# Altium PCB XM125.PcbDoc
Units mm, origin at the board's own origin, x right, y up, seen from the top; angles counter-clockwise.
Board outline 18.6 x 15 mm, 4 copper layers (Layer 1, Layer 2, Layer 3, Layer 4), stack 1 mm thick; 24 components, 28 nets, 164 pads, 93 vias.
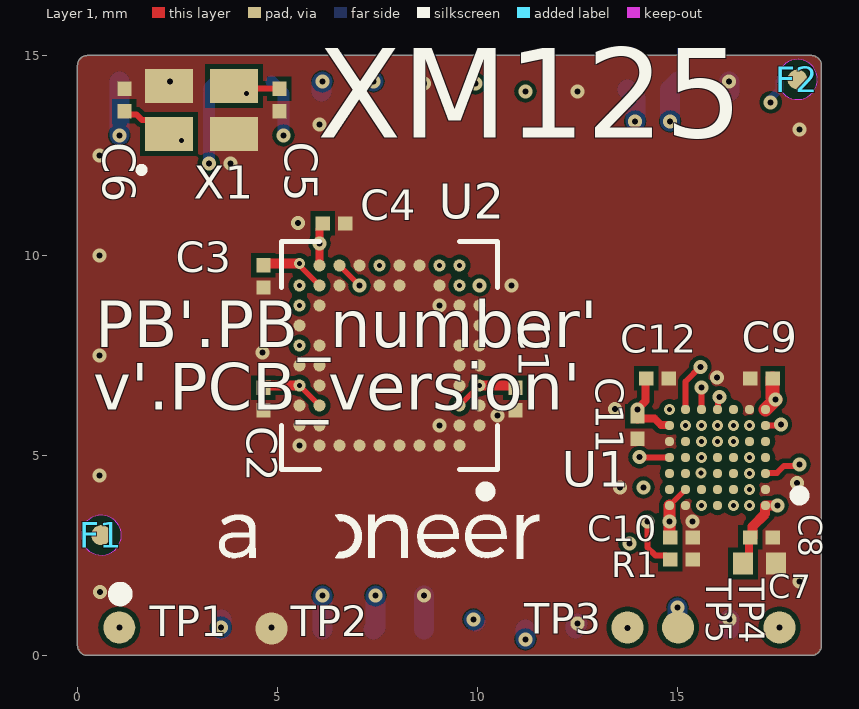
[diagram p0: Layer 1 view]
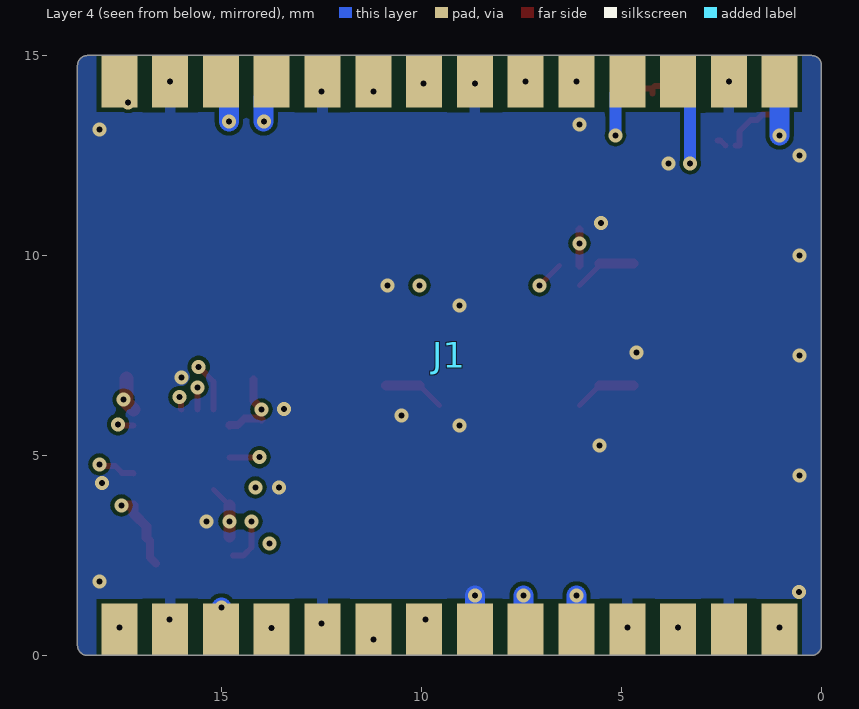
[diagram p1: Layer 4 view, seen from below]
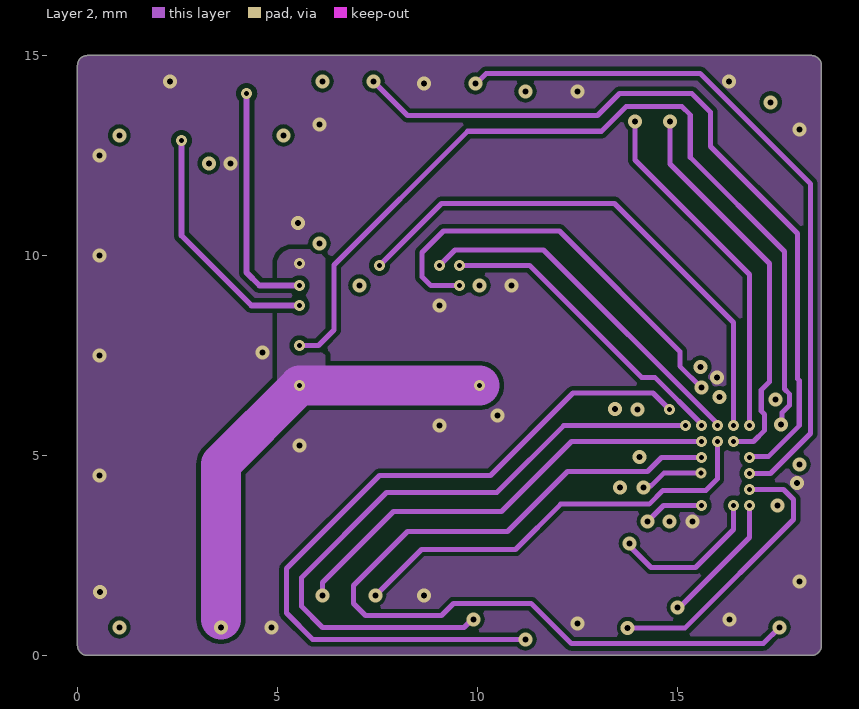
[diagram p2: Layer 2]
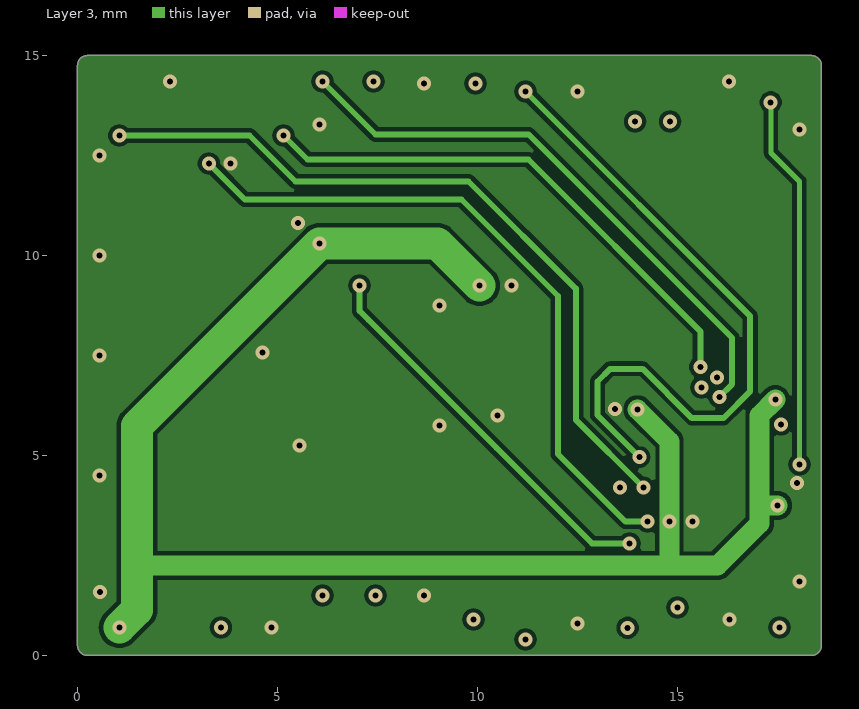
[diagram p3: Layer 3]
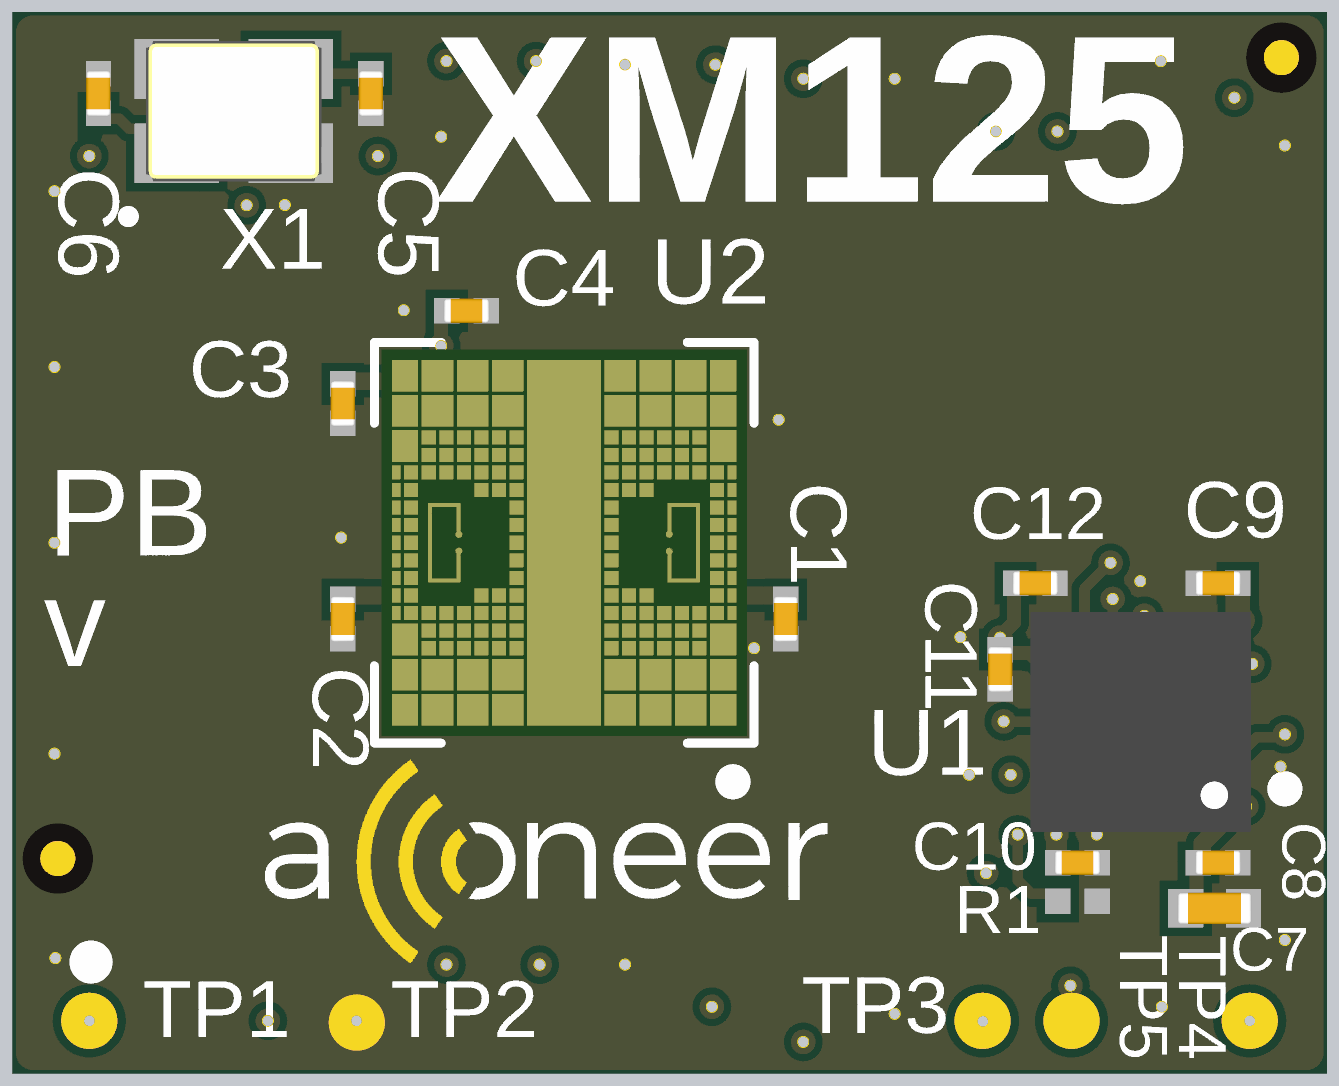
[diagram p4: 3D render of the assembled board from above, using the file's embedded part models]

## Layer stack, top to bottom
Top Solder: solder mask 0.0127, Solder Resist, Dk 3.3
Layer 1: signal copper 0.035
Dielectric 1: prepreg 0.075, FR-4, Dk 4.3
Layer 2: signal copper 0.035
Dielectric2: core 0.71, FR-4, Dk 4.3
Layer 3: signal copper 0.035
Dielectric3: prepreg 0.075, FR-4, Dk 4.3
Layer 4: signal copper 0.035
Bottom Solder: solder mask 0.0127, Solder Resist, Dk 3.3

## Board outline
0,0.25 0,14.75 cw(c0.25,14.75) 0.25,15 18.35,15 cw(c18.35,14.75) 18.6,14.75 18.6,0.25 cw(c18.35,0.25) 18.35,0 0.25,0 cw(c0.25,0.25)

## Design rules (kind name [scope] priority, off if disabled: settings)
Clearance Fiducial_keepout [IsKeepOut] p1: gap=0 ignorepadtopadclearanceinfootprint=TRUE
Clearance [All] p2: gap=0.1 ignorepadtopadclearanceinfootprint=TRUE except(0: Fill-Text Poly-Text Region-Text; 0.11: Arc-Via Arc-Fill Arc-Poly Arc-Region Track-Via Track-Fill Track-Poly Track-Region; 0.12: Arc-Hole Track-Hole SMDPad-SMDPad SMDPad-Fill SMDPad-Poly SMDPad-Region Fill-Fill Fill-Poly Fill-Region Poly-Poly Poly-Region Region-Region; 0.127: Text-Hole; 0.15: SMDPad-Hole THPad-Via; 0.2: Fill-Hole Poly-Hole Region-Hole; 0.25: Arc-THPad Track-THPad SMDPad-THPad THPad-Fill THPad-Poly THPad-Region; 0.254: THPad-Hole; 0.5: THPad-THPad)
ComponentClearance ComponentClearance_SB1 [InComponent('SB1')] p1: gap=0.08 collisioncheckmode=3 verticalgap=0.08 showdistances=FALSE
ComponentClearance [All] p2: gap=0.2 collisioncheckmode=3 verticalgap=0.2 showdistances=FALSE
HoleSize [All] p1: absolutevalues=TRUE maxlimit=2.54 minlimit=0.12 maxpercent=80.000 minpercent=20.000
HoleToHoleClearance [All] p1: gap=0.1 allowstackedmicrovias=FALSE
MinimumSolderMaskSliver [All] p1: minsoldermaskwidth=0.1
NetAntennae [All] p1 off: netantennaetolerance=0
PolygonConnect PolygonConnect_L1 [OnLayer('Layer 1')] p1: connectstyle=Direct reliefconductorwidth=0.2 reliefentries=4 polygonreliefangle="90 Angle" airgapwidth=0.127
PolygonConnect [All] p2: thpad.connectstyle=Relief thpad.reliefconductorwidth=0.254 thpad.reliefentries=4 thpad.polygonreliefangle="90 Angle" thpad.airgapwidth=0.127 smdpad.connectstyle=Relief smdpad.reliefconductorwidth=0.254 smdpad.reliefentries=4 smdpad.polygonreliefangle="90 Angle" smdpad.airgapwidth=0.127 via.connectstyle=Direct via.reliefconductorwidth=0.254 via.reliefentries=4 via.polygonreliefangle="90 Angle" via.airgapwidth=0.254
PolygonConnect PolygonConnect_A111_decoupling [HasFootprint('CAPC0603X04N_no_silkscreen') And OnLayer('Layer 1')] p3 off: thpad.connectstyle=Relief thpad.reliefconductorwidth=0.254 thpad.reliefentries=4 thpad.polygonreliefangle="90 Angle" thpad.airgapwidth=0.254 smdpad.connectstyle=Direct smdpad.reliefconductorwidth=0.254 smdpad.reliefentries=4 smdpad.polygonreliefangle="90 Angle" smdpad.airgapwidth=0.254 via.connectstyle=Relief via.reliefconductorwidth=0.254 via.reliefentries=4 via.polygonreliefangle="90 Angle" via.airgapwidth=0.254
PolygonConnect PolygonConnect_XTAL [HasFootprint('XTAL_320X260_no_silkscreen') And OnLayer('Layer 1')] p4 off: thpad.connectstyle=Relief thpad.reliefconductorwidth=0.254 thpad.reliefentries=4 thpad.polygonreliefangle="90 Angle" thpad.airgapwidth=0.254 smdpad.connectstyle=Direct smdpad.reliefconductorwidth=0.254 smdpad.reliefentries=4 smdpad.polygonreliefangle="90 Angle" smdpad.airgapwidth=0.254 via.connectstyle=Relief via.reliefconductorwidth=0.254 via.reliefentries=4 via.polygonreliefangle="90 Angle" via.airgapwidth=0.254
PolygonConnect PolygonConnect_A111 [HasFootprint('BGA50C50P10X10_520X550X90') And OnLayer('Layer 1')] p5 off: thpad.connectstyle=Relief thpad.reliefconductorwidth=0.254 thpad.reliefentries=4 thpad.polygonreliefangle="90 Angle" thpad.airgapwidth=0.254 smdpad.connectstyle=Direct smdpad.reliefconductorwidth=0.254 smdpad.reliefentries=4 smdpad.polygonreliefangle="90 Angle" smdpad.airgapwidth=0.254 via.connectstyle=Relief via.reliefconductorwidth=0.254 via.reliefentries=4 via.polygonreliefangle="90 Angle" via.airgapwidth=0.254
RoutingCorners [All] p1: cornerstyle=45-Degree minsetback=2 maxsetback=2
RoutingVias microvia [IsMicroVia] p1: holewidth=0.12 width=0.27 viastyle="Through Hole" minholewidth=0.12 minwidth=0.27 maxholewidth=0.12 maxwidth=0.27
RoutingVias [All] p2: holewidth=0.15 width=0.4 viastyle="Through Hole" minholewidth=0.12 minwidth=0.27 maxholewidth=0.15 maxwidth=0.4
SilkToSilkClearance [All] p1: silktosilkclearance=0.1
SilkToSolderMaskClearance [IsPad] p1: minsilkscreentomaskgap=0.05 clearancetoexposedcopper=TRUE
SolderMaskExpansion [All] p1: expansion=0 istentingtop=FALSE useseparateexpansions=TRUE expansionbottom=0 istentingbottom=FALSE
Width Width_power [InNetClass('Power')] p1: maxlimit=2 minlimit=0.127 preferedwidth=0.5 midlayer1_minwidth=0.3 midlayer2_minwidth=0.3 bottomlayer_minwidth=0.3 minimp=50.000000 maximp=50.000000 favimp=50.000000
Width [All] p2: maxlimit=2 minlimit=0.1 preferedwidth=0.15 toplayer_minwidth=0.12 midlayer2_minwidth=0.12 bottomlayer_minwidth=0.12 minimp=50.000000 maximp=50.000000 favimp=50.000000
22 further rules are at their usual default settings.

## Components (designator, comment, footprint, x,y, rotation, side; value= is the part's Value field where it differs from the comment)
C1 "Capacitor 1uF, metric 0603" CAPC0603X04L_no_silkscreen 10.95,6.415 r270 top value=1µF
C2 "Capacitor 1uF, metric 0603" CAPC0603X04L_no_silkscreen 4.65,6.415 r270 top value=1µF
C3 "Capacitor 1uF, metric 0603" CAPC0603X04L_no_silkscreen 4.65,9.48 r270 top value=1µF
C4 "Capacitor 1uF, metric 0603" CAPC0603X04L_no_silkscreen 6.41,10.8 r0 top value=1µF
C5 "Capacitor 8pF, metric 0603" CAPC0603X04L_no_silkscreen 5.05,13.89 r270 top value=8pF
C6 "Capacitor 8pF, metric 0603" CAPC0603X04L_no_silkscreen 1.175,13.89 r90 top value=8pF
C7 "Capacitor 4.7uF, metric 1005" CAPC1005X05L 17.05,2.3 r0 top value=4.7µF
C8 "Capacitor 100nF, metric 0603" CAPC0603X04L_no_silkscreen 17.1,2.95 r0 top value=100nF
C9 "Capacitor 100nF, metric 0603" CAPC0603X04L_no_silkscreen 17.1,6.925 r180 top value=100nF
C10 "Capacitor 100nF, metric 0603" CAPC0603X04L_no_silkscreen 15.1,2.95 r0 top value=100nF
C11 "Capacitor 100nF, metric 0603" CAPC0603X04L_no_silkscreen 14,5.7 r270 top value=100nF
C12 "Capacitor 1uF, metric 0603" CAPC0603X04L_no_silkscreen 14.5,6.925 r0 top value=1µF
F1 "Fiducial marker" "Fiducial 0.5 mm footprint-1" 0.597,3.009 r0 top
F2 "Fiducial marker" "Fiducial 0.5 mm footprint-1" 18,14.4 r180 top
J1 "28-pin LGA" LCCS127P1500X1800X0-28N 9.3,7.5 r90 bottom locked
R1 "Resistor 100 kOhm, metric 0603" RESC0603X03L_no_silkscreen 15.1,2.4 r180 top value=100k
TP1 "Testpoint" Testpoint_circular_0.8_no_silkscreen 1.045,0.7 r90 top
TP2 "Testpoint" Testpoint_circular_0.8_no_silkscreen 4.85,0.675 r90 top
TP3 "Testpoint" Testpoint_circular_0.8_no_silkscreen 13.75,0.7 r90 top
TP4 "Testpoint" Testpoint_circular_0.8_no_silkscreen 15.015,0.7 r90 top
TP5 "Testpoint" Testpoint_circular_0.8_no_silkscreen 17.55,0.7 r90 top
U1 "STM32L431CBY6TR" BGA49C40P7X7_314X313X58 16,4.95 r180 top locked
U2 "A121" BGA50C50P10X10_520X550X90 7.8,7.5 r180 top locked
X1 "ECS-240-8-36-RWN-TR3" ECS-240-8-36-RWN-TR3-Footprint-No-Silk 3.1,13.64 r0 top

## Footprints (in the part's own frame and the unit in brackets; to place one, negate y for a bottom-side part, rotate by r counter-clockwise, add the part's x,y. Pads: shape width x height; smd on the part's side, far side on the other; paste and mask are expansions set on the pad)
BGA49C40P7X7_314X313X58 [mm] "BGA, 49-Leads, Body 3,14x3.13mmx0.59mm, Pitch 0.40 mm"
  round 0.235 smd mask+0.03: A1(-1.2,1.2) A2(-0.8,1.2) A3(-0.4,1.2) A4(0,1.2) A5(0.4,1.2) A6(0.8,1.2) A7(1.2,1.2) B1(-1.2,0.8) B2(-0.8,0.8) B3(-0.4,0.8) B4(0,0.8) B5(0.4,0.8) B6(0.8,0.8) B7(1.2,0.8) C1(-1.2,0.4) C2(-0.8,0.4) C3(-0.4,0.4) C4(0,0.4) C5(0.4,0.4) C6(0.8,0.4) C7(1.2,0.4) D1(-1.2,0) D2(-0.8,0) D3(-0.4,0) D4(0,0) D5(0.4,0) D6(0.8,0) D7(1.2,0) E1(-1.2,-0.4) E2(-0.8,-0.4) E3(-0.4,-0.4) E4(0,-0.4) E5(0.4,-0.4) E6(0.8,-0.4) E7(1.2,-0.4) F1(-1.2,-0.8) F2(-0.8,-0.8) F3(-0.4,-0.8) F4(0,-0.8) F5(0.4,-0.8) F6(0.8,-0.8) F7(1.2,-0.8) G1(-1.2,-1.2) G2(-0.8,-1.2) G3(-0.4,-1.2) G4(0,-1.2) G5(0.4,-1.2) G6(0.8,-1.2) G7(1.2,-1.2)
  silkscreen extent -2.18,0.83 -1.93,1.07, body extent -1.57,-1.57 1.57,1.57, height 0.59
BGA50C50P10X10_520X550X90 [mm]
  round 0.3 smd paste-0.05 mask+0.05: A2(-1.75,2.25) A3(-1.25,2.25) A4(-0.75,2.25) A5(-0.25,2.25) A6(0.25,2.25) A7(0.75,2.25) A8(1.25,2.25) A9(1.75,2.25) B1(-2.25,1.75) B2(-1.75,1.75) B9(1.75,1.75) B10(2.25,1.75) C1(-2.25,1.25) C2(-1.75,1.25) C9(1.75,1.25) C10(2.25,1.25) D1(-2.25,0.75) D2(-1.75,0.75) D9(1.75,0.75) D10(2.25,0.75) E1(-2.25,0.25) E2(-1.75,0.25) E9(1.75,0.25) E10(2.25,0.25) F1(-2.25,-0.25) F2(-1.75,-0.25) F9(1.75,-0.25) F10(2.25,-0.25) G1(-2.25,-0.75) G10(2.25,-0.75) H1(-2.25,-1.25) H2(-1.75,-1.25) H9(1.75,-1.25) H10(2.25,-1.25) J1(-2.25,-1.75) J2(-1.75,-1.75) J3(-1.25,-1.75) J5(-0.25,-1.75) J6(0.25,-1.75) J8(1.25,-1.75) J9(1.75,-1.75) J10(2.25,-1.75) K2(-1.75,-2.25) K3(-1.25,-2.25) K4(-0.75,-2.25) K5(-0.25,-2.25) K6(0.25,-2.25) K7(0.75,-2.25) K8(1.25,-2.25) K9(1.75,-2.25)
  silkscreen extent -2.7,-2.85 2.7,3.52, body extent -2.6,-2.75 2.6,2.75, height 0.51
CAPC0603X04L_no_silkscreen [mm] "Chip Capacitor, 2-Leads, Body 0.60x0.30mm, IPC Least Density, no silkscreen"
  rect 0.36x0.36 smd: 1(-0.28,0) 2(0.28,0)
  body extent -0.33,-0.18 0.33,0.18, height 0.35
CAPC1005X05L [mm] "Chip Capacitor, 2-Leads, Body 1.00x0.50mm, IPC High Density"
  rect 0.5x0.55 smd: 1(-0.41,0) 2(0.41,0)
  body extent -0.53,-0.23 0.53,0.23, height 0.5
ECS-240-8-36-RWN-TR3-Footprint-No-Silk [mm] "Crystal, 4-Leads, Body 2.5x2.0mm, IPC High Density"
  rect 1.2x0.85 smd: 1(-0.813,-0.6) 2(0.813,-0.6) 3(0.813,0.6) 4(-0.813,0.6)
  silkscreen extent -1.55,-1.55 -1.45,-1.45, body extent -1.25,-1 1.25,1, height 0.6
"Fiducial 0.5 mm footprint-1" [mm]
  round 0.5 smd paste-0.5 mask+0.25: 1(0,0)
  Layer 1 keep-out circle w0: c0,0 r0.5
LCCS127P1500X1800X0-28N [mm] "LCC, 28-Pins, Body 15.00x18.00 mm, Pitch 1.27mm"
  rect 1.3x0.9 smd paste-5: 1(-6.85,-8.255) 2(-6.85,-6.985) 3(-6.85,-5.715) 4(-6.85,-4.445) 5(-6.85,-3.175) 6(-6.85,-1.905) 7(-6.85,-0.635) 8(-6.85,0.635) 9(-6.85,1.905) 10(-6.85,3.175) 11(-6.85,4.445) 12(-6.85,5.715) 13(-6.85,6.985) 14(-6.85,8.255) 15(6.85,8.255) 16(6.85,6.985) 17(6.85,5.715) 18(6.85,4.445) 19(6.85,3.175) 20(6.85,1.905) 21(6.85,0.635) 22(6.85,-0.635) 23(6.85,-1.905) 24(6.85,-3.175) 25(6.85,-4.445) 26(6.85,-5.715) 27(6.85,-6.985) 28(6.85,-8.255)
RESC0603X03L_no_silkscreen [mm] "Chip Resistor, 2-Leads, Body 0.60x0.30mm, IPC High Density"
  rect 0.36x0.36 smd: 1(-0.28,0) 2(0.28,0)
  body extent -0.32,-0.17 0.32,0.17, height 0.28
Testpoint_circular_0.8_no_silkscreen [mm]
  round 0.8 smd paste-5: 1(0,0)

## Part data
C1 C2 C3 C4 C12: library part CMP-001-00106-9, "Generic 1uF SMD capacitor, metric 0603 (0201)", Case Code (Imperial)=0201, Case Code (Metric)=0603, Max Operating Temperature=85°C, Min Operating Temperature=-40°C, Tolerance=20%, Voltage Rating=10V, Mounting Technology=SMD, Pins=2, RoHS Compliant=Yes
C5 C6: library part CMP-001-00107-7, "Generic 8pF SMD capacitor, metric 0603 (0201)", Capacitor Type=Ceramic, Case Code (Imperial)=0201, Case Code (Metric)=0603, Max Operating Temperature=85°C, Min Operating Temperature=-40°C, Temperature Coefficient="C0G, NP0", Tolerance=20%, Voltage Rating=10V, Mounting Technology=SMD, Pins=2, RoHS Compliant=Yes
C7: library part CMP-001-00105-9, "Generic 4.7uF SMD capacitor, metric 1005 (0402)", Case Code (Imperial)=0402, Case Code (Metric)=1005, Max Operating Temperature=85°C, Min Operating Temperature=-40°C, Tolerance=20%, Voltage Rating=10V, Mounting Technology=SMD, Pins=2, RoHS Compliant=Yes
C8 C9 C10 C11: library part CMP-001-00119-4, "Generic 100 nF SMD capacitor, metric 0603 (0201)", Case Code (Imperial)=0201, Case Code (Metric)=0603, Max Operating Temperature=85°C, Min Operating Temperature=-40°C, Tolerance=20%, Voltage Rating=10V, Mounting Technology=SMD, Pins=2, RoHS Compliant=Yes
F1 F2: library part CMP-00028-00007-12
J1: library part CMP-002-00117-37, "28-pin Land Grid Array (LGA), pitch 1.27 mm", Connector Type=LGA, Pins=28
R1: library part CMP-009-00221-3, "100 kOhm generic SMD resistor, +/-1%, metric 0603 (0201)", Case Code (Imperial)=0201, Case Code (Metric)=0603, Max Operating Temperature=85°C, Min Operating Temperature=-40°C, Tolerance=1%, Mounting Technology=SMD, Pins=2, RoHS Compliant=Yes
TP1 TP2 TP3 TP4 TP5: library part CMP-00030-00001-11, "Circular test point"
U1: library part CMP-020-00029-7, "RISC Microcontroller, 32-Bit, FLASH, 80MHz, CMOS, PBGA49", Max Operating Temperature=85°C, Max Supply Voltage=3.6V, Min Operating Temperature=-40°C, Min Supply Voltage=1.71V, RoHS Compliant=Yes
U2: library part CMP-010-00030-4, "Acconeer A121 pulsed coherent 60 GHz radar sensor", Manufacturer="Acconeer AB", Max Operating Tempereture=85, Min Operating Temperature=-40°C, Package=fcCSP50, Package Size="5.2 x 5.5 x 0.88 mm", ComponentLink1Description=Datasheet, Mounting Type=SMD
X1: library part CMP-003-00040-8, "Crystal 24 MHz 2.5 x 2.0 mm 4-SMD", Case/Package=4-SMD, Frequency=24MHz, Load Capacitance=8pF, Manufacturer="ECS Inc.", Max Operating Temperature=85°C, Min Operating Temperature=-40°C, ESR=60, Mounting Technology=SMD, Pins=4, RoHS Compliant=Yes

## Via types
v1: diameter 0.35, hole 0.15, Layer 1 to Layer 4, tented both sides, 64 vias
v2: diameter 0.27, hole 0.12, Layer 1 to Layer 2, tented top, 22 vias
v3: diameter 0.27, hole 0.12, Layer 1 to Layer 2, tented both sides, 7 vias

## Nets (pads, with @x,y where several pads share a name; then routed paths per layer and width w, separated by ;. In a path a pad name is that pad's centre, name@x,y a point inside that pad or via, vN(x,y) a via of type N, cw(c..) or ccw(c..) an arc to the next point about the centre after c; other vN are vias at no path point)
1V8_sensor: C1.1 C2.1 C3.1 J1.3 U2.C2 U2.C9 U2.D1 U2.D10 U2.J9 | length 16.1
  Layer 1 w0.127: v3(5.55,6.75) U2.C9 ; v3@5.55,9.75 U2.J9 ; U2.C2 v3(10.05,6.75)
  Layer 1 w0.25: C2.1@4.7,6.75 v3(5.55,6.75) ; C3.1@4.7,9.8 v3(5.55,9.8) ; v3(10.05,6.75) C1.1@10.885,6.75
  Layer 2 w1: 3.585,0.9 3.585,4.785 v3(5.55,6.75) v3(10.05,6.75)
  Layer 4 w0.5: J1.3 3.6,0.665 J1.3@3.6,0.9
  other v1: 3.585,0.7
DEBUG_UART_RX: J1.21 U1.C2 | length 17.8
  Layer 2 w0.127: v1(9.95,14.3) 9.967,14.3 10.217,14.55 15.566,14.55 18.325,11.791 18.325,5.55 17.325,4.55 v2(16.8,4.55)
DEBUG_UART_TX: J1.23 U1.D2 | length 19.5
  Layer 2 w0.127: v1(7.4,14.35) 8.25,13.5 13,13.5 13.55,14.05 15.358,14.05 15.825,13.583 15.825,12.725 17.998,10.552 17.998,6.919 18.045,6.872 18.045,5.745 17.271,4.971 16.821,4.971 v2(16.8,4.95)
  Layer 4 w0.4: J1.23 J1.23@7.4,14.345
  Layer 4 w0.5: J1.23@7.4,14.345 v1(7.4,14.35)
ENABLE: U1.F1 U2.F10 | length 22.5
  Layer 1 w0.127: v1@17.499,5.75 17.526,5.778 v1(17.585,5.778)
  Layer 1 w0.15: U1.F1 v1@17.499,5.75
  Layer 2 w0.127: v2(5.55,7.75) 6.023,7.75 6.411,8.138 6.411,9.761 9.756,13.106 13.1,13.106 13.72,13.726 15.108,13.726 15.318,13.515 15.318,12.455 17.675,10.099 17.675,6.663 17.797,6.54 17.797,6.252 17.616,6.071 17.616,5.809 v1(17.585,5.778)
GND: C1.2 C2.2 C3.2 C4.2 C5.2 C6.2 C7.2 C8.2 C9.2 C10.2 C11.2 C12.2 J1.2 J1.4 J1.7 J1.10 J1.13 J1.16 J1.19 J1.22 J1.27 R1.1 TP2.1 U1.A6 U1.B1 U1.E7 U1.G2 U2.A2 U2.A3 U2.A4 U2.A5 U2.A6 U2.A7 U2.A8 U2.A9 U2.B1 U2.B2 U2.B9 U2.B10 U2.C1 U2.C10 U2.D2 U2.D9 U2.E1 U2.E2 U2.E9 U2.E10 U2.F1 U2.F2 U2.F9 U2.G1 U2.G10 U2.H1 U2.H2 U2.H9 U2.J3 U2.J5 U2.J6 U2.J8 U2.K4 U2.K5 U2.K7 X1.2 X1.4 | length 1.5
  Layer 4 w0.5: J1.4@4.846,0.682 4.846,0.659 J1.4 ; J1.7 v1(8.665,1.5) ; J1.10@12.454,0.671 12.454,0.754 v1(12.5,0.8) ; J1.13 16.285,0.885 v1(16.3,0.9) ; v1(16.285,14.35) 16.3,14.335 J1.16@16.3,14.1
  other v1: 4.846,0.7 0.563,1.593 18.05,1.85 15.375,3.35 13.559,4.2 17.988,4.316 0.55,4.5 5.55,5.25 9.05,5.75 10.5,6 13.434,6.157 15.993,6.954 0.55,7.5 4.627,7.573 9.05,8.75 10.85,9.25 0.55,10 5.518,10.807 3.827,12.304 0.55,12.5 18.05,13.15 6.05,13.276 12.5,14.1 8.665,14.3 2.315,14.35
I2C_ADDR: J1.20 U1.D7 | length 17.6
  Layer 1 w0.15: v1(14.05,4.959) 14.054,4.954 14.796,4.954 U1.D7
  Layer 3 w0.15: v1(11.2,14.1) 16.818,8.482 16.818,6.602 16.151,5.935 15.36,5.935 14.131,7.164 13.317,7.164 13.001,6.849 13.001,6.007 v1(14.05,4.959)
I2C_SCL: J1.17 U1.E3 | length 10.8
  Layer 2 w0.127: v1(14.815,13.35) 14.815,12.285 17.3,9.8 17.3,6.843 17.094,6.637 17.094,6.113 17.179,6.027 17.179,5.629 16.9,5.35 v2(16.4,5.35)
  Layer 4 w0.5: v1(14.815,13.35) 14.815,14.15 J1.17
I2C_SDA: J1.18 U1.F2 | length 9.7
  Layer 2 w0.127: v1(13.94,13.35) 13.94,12.385 16.8,9.525 v2(16.8,5.75)
  Layer 4 w0.5: J1.18@13.745,14.15 13.945,13.95 v1@13.945,13.35
INTERRUPT: U1.A3 U2.K8 | length 14.4
  Layer 1 w0.127: U2.K8 v1(7.05,9.25)
  Layer 2 w0.127: v1(13.8,2.8) 13.8,2.74 14.34,2.2 15.45,2.2 16.4,3.15 v2(16.4,3.75)
  Layer 3 w0.15: v1(7.05,9.25) 7.05,8.617 7.28,8.387 10.479,5.188 12.867,2.8 v1(13.8,2.8)
MCU_INT: J1.28 U1.C5 | length 21.6
  Layer 2 w0.127: v1(14.15,4.2) 14.193,4.243 14.343,4.243 14.659,4.559 v2(15.591,4.559)
  Layer 3 w0.15: v1(1.045,13) 4.3,13 5.45,11.85 9.776,11.85 12.457,9.168 12.457,5.893 v1(14.15,4.2)
  Layer 4 w0.5: v1(1.045,13) J1.28
MISC_GPIO0: J1.24 U1.G4 | length 15.1
  Layer 1 w0.15: U1.G4 16.016,6.166 16.016,6.425 v1(16.051,6.461)
  Layer 3 w0.15: v1(6.125,14.35) 7.45,13.025 11.279,13.025 16.367,7.937 16.367,6.783 16.051,6.468 v1(16.051,6.461)
  Layer 4 w0.5: J1.24@6.1,14.1 6.1,14.325 v1(6.125,14.35)
MISC_GPIO1: J1.25 U1.G6 | length 16
  Layer 1 w0.15: U1.G6 15.2,6.844 v1(15.571,7.215)
  Layer 3 w0.15: v1(5.15,13) 5.75,12.4 11.275,12.4 15.57,8.105 v1(15.571,7.215) v1(15.571,7.215)
  Layer 4 w0.3: J1.25 5.15,14.055 v1(5.15,13)
MISC_GPIO2_BOOT0: J1.26 R1.2 U1.A5 | length 21.7
  Layer 1 w0.15: v1(14.25,3.35) 14.25,2.7 14.445,2.505 R1.2@14.715,2.505
  Layer 2 w0.127: v1(14.25,3.35) 14.65,3.75 v2(15.6,3.75)
  Layer 3 w0.15: v1(3.284,12.3) 4.184,11.4 9.6,11.4 12.013,8.987 12.013,5.033 13.696,3.35 v1(14.25,3.35)
  Layer 4 w0.3: v1(3.284,12.3) 3.285,12.301 J1.26@3.285,14.05
  Layer 4 w0.5: J1.26@3.385,14.15 J1.26
NRESET: J1.14 TP5.1 U1.D5 | length 22
  Layer 2 w0.127: v2(15.6,4.95) 14.6,4.95 14.25,4.6 12.25,4.6 10.75,3.1 8.25,3.1 6.9,1.75 6.9,1.3 7.2,1 9.1,1 9.4,1.3 11.343,1.3 12.346,0.297 17.147,0.297 v1(17.55,0.7)
  Layer 4 w0.5: J1.14@17.55,0.655 J1.14
SPI_CLK: U1.F5 U2.K2 | length 7.7
  Layer 2 w0.127: v3(9.55,9.75) 11.304,9.75 14.101,6.954 14.433,6.954 15.6,5.786 v2(15.6,5.75)
SPI_MISO: U1.F4 U2.K3 | length 9
  Layer 2 w0.127: v3(9.05,9.75) 9.44,10.14 11.651,10.14 15.929,5.863 15.929,5.86 16,5.789 v2(16,5.75)
SPI_MOSI: U1.F3 U2.K6 | length 13.3
  Layer 2 w0.127: v3(7.55,9.75) 9.1,11.3 13.425,11.3 16.4,8.325 v2(16.4,5.75)
SPI_SS: U1.G5 U2.J2 | length 11.2
  Layer 1 w0.15: U1.G5 v1(15.6,6.7)
  Layer 2 w0.127: v3@9.549,9.249 8.835,9.249 8.615,9.469 8.615,10.073 9.152,10.61 12.051,10.61 15.06,7.601 15.06,7.233 15.593,6.7 v1(15.6,6.7)
  other v3: 9.55,9.25
SWDCLK: J1.12 TP4.1 U1.A2 | length 4.4
  Layer 1 w0.2: v1(15,1.2) 15.007,1.193 15.007,0.708 TP4.1
  Layer 2 w0.127: v1(15,1.2) 15.05,1.2 16.8,2.95 v2(16.8,3.75)
  Layer 4 w0.5: v1(15,1.2) 15,0.665 J1.12
SWDIO: J1.11 TP3.1 U1.B2 | length 7
  Layer 1 w0.2: TP3.1 13.755,0.695 v1(13.755,0.692)
  Layer 2 w0.127: v1(13.755,0.692) 15.192,0.692 17.9,3.4 17.9,3.9 17.65,4.15 v2(16.8,4.15)
  Layer 4 w0.5: J1.11 13.745,0.682 v1(13.755,0.692)
UART_CTS: J1.8 U1.F6 | length 16.6
  Layer 2 w0.127: v1(9.9,0.9) 9.864,0.9 9.664,0.7 6.128,0.7 5.6,1.228 5.6,1.947 7.728,4.074 10.484,4.074 12.155,5.746 v2(15.2,5.746)
  Layer 4 w0.5: v1(9.9,0.9) J1.8@9.95,0.85
UART_RTS: J1.9 U1.G7 | length 19.2
  Layer 2 w0.127: v1(11.2,0.4) 5.883,0.4 5.223,1.06 5.223,2.173 7.55,4.5 10.326,4.5 12.385,6.559 14.391,6.559 v2(14.8,6.15)
  Layer 4 w0.5: v1(11.2,0.4) J1.9@11.2,0.655
UART_RX: J1.6 U1.E4 | length 11.6
  Layer 2 w0.127: v1(7.45,1.5) 8.6,2.65 10.95,2.65 12.082,3.782 14.293,3.782 14.64,4.13 15.714,4.13 16,4.416 v2(16,5.35)
  Layer 4 w0.5: J1.6 7.45,0.705 v1(7.45,1.5)
UART_TX: J1.5 U1.E5 | length 12.1
  Layer 2 w0.127: v1(6.125,1.5) 6.125,1.825 7.9,3.6 10.6,3.6 12.35,5.35 v2(15.6,5.35)
  Layer 4 w0.5: J1.5 v1(6.125,1.5)
VIN_sensor: C4.1 C7.1 C8.1 C9.1 C10.1 C11.1 C12.1 J1.1 TP1.1 U1.A1 U1.A7 U1.B6 U1.F7 U1.G1 U2.J1 U2.K9 | length 46.8
  Layer 1 w0.12: U1.A7 U1.B6
  Layer 1 w0.2: v1(1.047,0.7) 1.047,0.698 TP1.1@1.047,0.691 ; U2.K9 v1(6.05,10.3) C4.1@6.05,10.65 ; C11.1@14,5.9 14.03,5.93 14.42,5.93 14.593,5.757 14.793,5.757 U1.F7 ; v1(14,6.15) 14,6.164 14.2,6.364 C12.1@14.2,6.9 ; C7.1 16.79,2.45 C8.1@16.79,2.87 ; U1.A1@17.193,3.743 U1.A1
  Layer 1 w0.25: C8.1@16.87,2.95 16.875,2.955 16.875,3.225 17.193,3.543 U1.A1@17.193,3.743 ; U1.A1 v1(17.5,3.75)
  Layer 1 w0.3: C10.1@14.8,2.97 v1(14.8,3.35) U1.A7
  Layer 1 w0.35: U1.G1 17.446,6.396 v1(17.448,6.396) 17.38,6.464 C9.1
  Layer 3 w0.5: 1.488,2.25 14.8,2.25 ; v1(14,6.15) 14.8,5.35 14.8,2.25 ; v1(17.448,6.396) 17.446,6.396 17.05,5.999 17.05,3.75 ; v1(17.5,3.75) 17.05,3.75 ; 14.8,2.25 16,2.25 17.05,3.3 17.05,3.75
  Layer 3 w0.8: v1(1.047,0.7) 1.488,1.141 1.488,2.25 1.488,5.737 v1(6.05,10.3) 9,10.3 v1(10.05,9.25)
  Layer 4 w0.45: J1.1 1.045,0.689 J1.1@1.047,0.691
WAKE_UP: J1.15 U1.C1 | length 10.9
  Layer 1 w0.15: U1.C1 17.216,4.566 17.487,4.566 17.658,4.737 18.012,4.737 v1(18.05,4.775)
  Layer 3 w0.127: v1(17.332,13.83) 17.335,13.827 17.335,12.565 18.05,11.85 v1(18.05,4.775)
  Layer 4 w0.2: v1(17.332,13.83) 17.332,13.932 17.555,14.155 J1.15
XIN: C5.1 U2.J10 X1.3 | length 7.2
  Layer 1 w0.15: X1.3 4.16,14.24 X1.3@4.227,14.173 ; v2(4.228,14.047) 4.228,14.172 X1.3@4.227,14.173 ; C5.1@5.047,14.173 X1.3@4.227,14.173
  Layer 2 w0.15: v2(4.228,14.047) 4.228,9.572 4.55,9.25 v2(5.55,9.25)
XOUT: C6.1 U2.H10 X1.1 | length 7.8
  Layer 1 w0.15: C6.1 1.257,13.528 1.472,13.528 1.61,13.39 1.762,13.39 2.05,13.102 2.05,12.75 X1.1@2.15,12.75 ; X1.1@2.4,12.75 2.525,12.875 v2(2.6,12.875)
  Layer 2 w0.15: v2(2.6,12.875) 2.6,10.5 4.35,8.75 v2(5.55,8.75)
pads on no net: F1.1 F2.1 U1.A4 U1.B3 U1.B4 U1.B5 U1.B7 U1.C3 U1.C4 U1.C6 U1.C7 U1.D1 U1.D3 U1.D4 U1.D6 U1.E1 U1.E2 U1.E6 U1.G3

## Polygon pours and split planes (outlines as drawn)
GND on Layer 2 "GND_L02_P028" (solid, remove dead copper, pour order 28): 0,0.25 0,14.75 cw(c0.25,14.75) 0.25,15 18.35,15 cw(c18.35,14.75) 18.6,14.75 18.6,0.25 cw(c18.35,0.25) 18.35,0 0.25,0 cw(c0.25,0.25)
1V8_sensor on Layer 2 "1V8_SENSOR_L02_P026" (solid, pour order 26): 5.35,10.15 ccw(c5.35,9.8) 5,9.8 5,6.8 5.9,6.8 6.2,7.1 6.2,9.9 ccw(c5.95,9.9) 5.95,10.15
GND on Layer 4 "GND_L04_P024" (solid, remove dead copper, pour order 24): 0,0.25 0,14.75 cw(c0.25,14.75) 0.25,15 18.35,15 cw(c18.35,14.75) 18.6,14.75 18.6,0.25 cw(c18.35,0.25) 18.35,0 0.25,0 cw(c0.25,0.25)
GND on Layer 3 "GND_L03_P025" (solid, remove dead copper, pour order 25): 0,0.25 0,14.75 cw(c0.25,14.75) 0.25,15 18.35,15 cw(c18.35,14.75) 18.6,14.75 18.6,0.25 cw(c18.35,0.25) 18.35,0 0.25,0 cw(c0.25,0.25)
GND on Layer 1 "GND_L01_P027" (solid, remove dead copper, pour order 27): 0,0.25 0,14.75 cw(c0.25,14.75) 0.25,15 18.35,15 cw(c18.35,14.75) 18.6,14.75 18.6,0.25 cw(c18.35,0.25) 18.35,0 0.25,0 cw(c0.25,0.25)

## Silkscreen, mask and mechanical layers (free items; w line width, h text height)
Top Overlay:
  drawing of 7 lines, arcs and shapes, not listed
  text "XM125" at 6,12.2 h3.85
  text "PB'.PB_number'" at 0.45,7.322 h2
  text "v'.PCB_version'" at 0.4,5.75 h2
Top Solder:
  drawing of 3 lines, arcs and shapes, not listed
Board Shape:
  the board outline again, w0.1
Manufacturer Info:
  lines w0.1: 3.55,0.6 3.925,0.25 3.922,0.25 ; 3.55,14.15 3.525,14.15 3.875,14.5 3.9,14.5 4.275,14.15
  lines w0.15: 3.55,0.6 3.925,0.25 ; 3.55,14.15 3.9,14.5 ; 3.9,7.725 3.925,0.25 ; 3.9,10.375 3.9,14.5 ; 4.275,0.6 3.925,0.25 ; 4.275,14.15 3.9,14.5 ; 11.25,5.375 11.25,7.85 12.1,8.7 ; 11.7,8.7 12.1,8.7 ; 12.1,8.3 12.1,8.7
  lines w0.254: 12.4,9.2 16.9,9.2 16.9,11.2 12.4,11.2 12.4,9.2
  text "YYWW" at 12.601,9.7 h1.4
  text "Copper to the edges, TOP and Bottom layer (Y plane)" at 1.35,8.025 h0.8
  text "Designated area for manufacturer date placement (silkscreen layer). Other manufacturer info (logo etc)  should be placed in the panel." at 8.375,1.225 h0.8